# Altium PCB TeamC&K_PCB.PcbDoc (part 2 of 2)
Units mil, origin at the board's own origin, x right, y up, seen from the top; angles counter-clockwise.
Board outline 3149.61 x 2362.21 mil, 4 copper layers (Top Layer, GND, VCC, Bottom Layer), stack 30.835 mil thick; 107 components, 60 nets, 325 pads, 86 vias.
Unrouted connection lines stored in the file: 14.
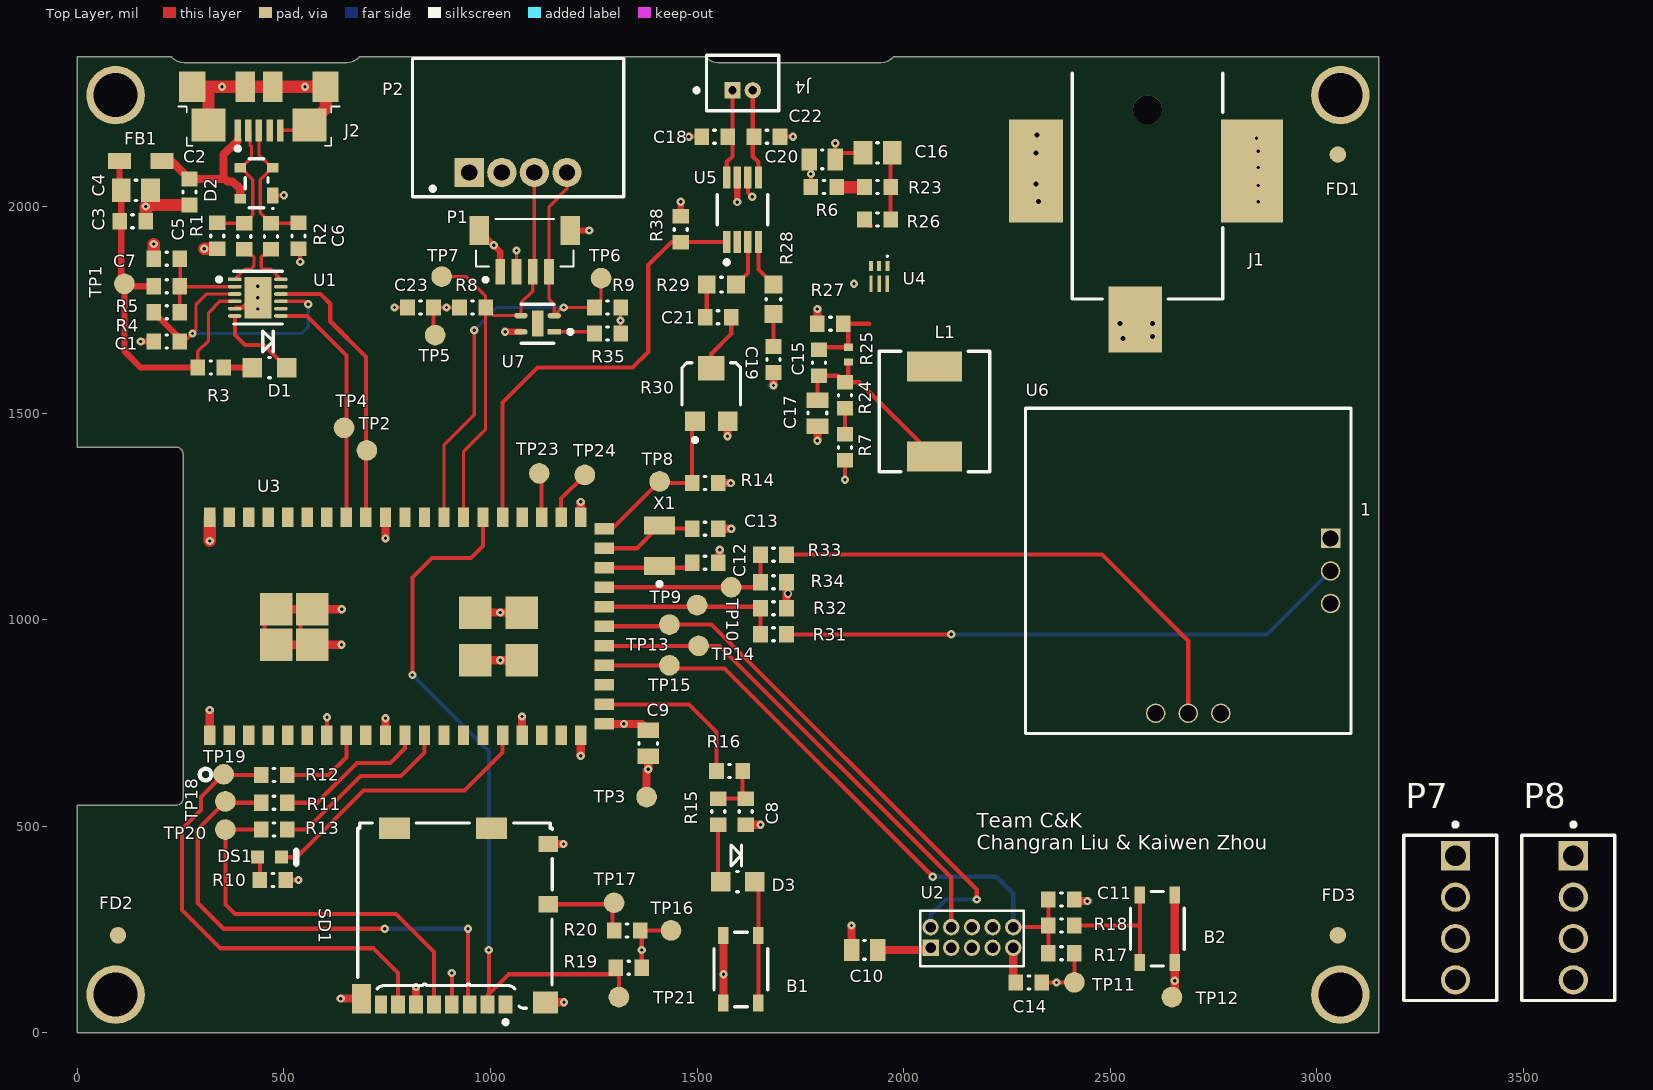
[diagram p0: Top Layer view]

## Via types
v1: diameter 20, hole 8, Top Layer to Bottom Layer, 76 vias
v2: diameter 20, hole 12, Top Layer to Bottom Layer, 9 vias
v3: diameter 20, hole 8, Top Layer to Bottom Layer, tented both sides, 1 vias

## Nets (pads, with @x,y where several pads share a name; then routed paths per layer and width w, separated by ;. In a path a pad name is that pad's centre, name@x,y a point inside that pad or via, vN(x,y) a via of type N, cw(c..) or ccw(c..) an arc to the next point about the centre after c; other vN are vias at no path point) (continued)
GND: (continued)
  Top Layer w20: U3.1 v1(320.65,781.28) ; U3.0@481.08,939.47 568.41,939.47 v1(639.27,939.47) ; U3.0@481.08,1025.38 568.41,1025.38 v1(639.98,1025.38) ; v1(637.58,82.89) SD1.12 ; U3.10 v1(745.85,761.59) ; v1(745.85,1196.85) U3.42 ; SD1.6 v1(819.86,111.2) ; U3.0@963.6,902.15 v1(1023.62,902.15) U3.0@1076,902.15 ; U3.0@963.6,1017.27 v1(1023.62,1017.27) U3.0@1076,1017.27 ; U3.17 v1(1076.56,765.96) ; SD1.11 v1(1177.93,74.04) ; SD1.10 v1(1176.95,456.91) ; v1(1218.29,671.04) U3.20 ; U3.32 v1(1218.29,1285.22) ; TP3.1 v1@1377.95,633.86 ; v1(1381.89,637.8) C9.1 ; C13.1 v1(1582.67,1220.47) ; R14.1 v1(1581.69,1330.71) ; C12.1@1555.12,1137.8 v1(1555.12,1169.29) ; B1.4 v1(1563.98,141.73) B1.3 ; v1(1573.82,1443.89) R30.3 ; C8.1 v1(1653.54,503.94) ; v1(1685.04,1566.93) C19.2 ; R32.1 R34.1 ; v1(1791.34,1433.07) C17.1 ; R27.1 v1(1791.34,1751.97) ; C10.1 v1(1874.02,259.84) ; C14.1@2265.35,128.35 U2.9 ; C11.1 2417.32,318.9 v1(2444.88,318.9) ; TP12.1@2656.5,93.5 v1(2656.5,125.98) B2.3 B2.4
  Top Layer w30: C3.1 v1(165.35,2000) 169.29,2003.94 C2.1 ; C7.1 v1(185.04,1909.45) ; J2.10 v1(350.39,2290) J2.9 J2.8 v1(551.18,2290) J2.7 601,2236.85 J2.6 ; v1(307.09,1897.64) C5.1 ; J2.11 317.54,2286.89 ; v1(320.65,1190.73) U3.51
  Bottom Layer w10: v1(539.37,1866.14) v1@539.37,1870.08
  Bottom Layer w20: v1@1681.11,1566.93 v1(1685.04,1566.93) ; v1(2444.88,318.9) v1@2448.82,318.9
  other v1: 437.01,1751.97 437.01,1779.53 437.01,1807.09 1879.92,1812.99
  other v2: 1720.47,1062.99 2531.5,1681.1 2602.36,1685.04 2523.62,1716.54 2602.36,1716.54 2326.77,2011.81 2320.47,2055.12 2320.47,2129.92 2322.83,2173.23
I2C_SCL_1: P1.4 P2.4 P7.4 P8.4 R9.1 TP6.1 U3.39 U7.2 | length 1272.1
  Top Layer w8: U3.39 887.58,1423.01 960.63,1496.06 v1(960.63,1700.79) ; v1@1174.21,1755.91 U7.2 1154.53,1762.8 1141.73,1775.59 P1.4 1141.73,2000 1185.04,2043.31 P2.4 ; v1(1177.17,1755.91) R9.1 1267.72,1771.65 TP6.1
  Bottom Layer w8: v1(960.63,1700.79) 1015.75,1755.91 v1(1177.17,1755.91)
I2C_SDA_1: P1.3 P2.3 P7.3 P8.3 R8.1 TP7.1 U3.38 U7.3 | length 1137.1
  Top Layer w8: TP7.1 940.94,1830.71 988.19,1783.46 R8.1 ; U3.38 934.82,1407.26 988.19,1460.63 R8.1 ; P2.3 1106.3,1846.46 P1.3 1102.36,1795.28 1073.82,1766.73 U7.3 1007.87,1736.22 R8.1
JOYSTICK_X_1: R31.1 R32.2 TP9.1 U3.27 | length 443.1
  Top Layer w10: U3.27 1649.76,1031.34 R32.2 R31.1
JOYSTICK_Y_1: R33.1 R34.2 TP10.1 U3.28 | length 433.8
  Top Layer w10: U3.28 TP10.1 R34.2@1641.89,1078.58 ; R34.2 R33.1
MCU_LED: DS1.2 U3.16 | length 681.3
  Top Layer w10: DS1.2 531.5,425.2 692.91,586.61 937.01,586.61 1029.31,678.92 U3.16
MCU_RESET: C11.2 R17.1 R18.2 TP15.1 U2.10 U3.24 | length 1517.1
  Top Layer w10: U3.24 TP15.1@1433.23,889.61 ; TP15.1 TP15.1@1433.23,889.61 ; v1(2070.87,377.95) 1566.93,881.89 1440.94,881.89 TP15.1@1433.23,889.61 ; U2.10 2346.46,255.91 R18.2 ; R17.1 R18.2 ; C11.2 R18.2
  Bottom Layer w10: v1(2070.87,377.95) 2224.41,377.95 2265.35,337.01 U2.10
MCU_RX_UART_CLI_1: TP4.1 U1.7 U3.44 | length 590
  Top Layer w10: U1.7 556.1,1735.24 651.36,1639.98 U3.44
MCU_TX_UART_CLI_1: TP2.1 U1.10 U3.43 | length 681.8
  Top Layer w10: U1.10 588.58,1788.39 612.2,1764.76 612.2,1722.44 698.6,1636.04 U3.43
MEM_SPI_CLK: R13.2 SD1.5 TP20.1 | length 947.1
  Top Layer w10: R13.2 TP20.1 358.27,311.02 381.89,287.4 771.65,287.4 863.17,195.89 SD1.5
MEM_SPI_MISO: R12.2 SD1.7 TP19.1 | length 1123.5
  Top Layer w10: R12.2 356.3,624.02 TP19.1 299.21,570.87 299.21,539.37 253.41,493.57 253.41,297.77 346.46,204.72 716.54,204.72 776.56,144.7 SD1.7
MEM_SPI_MOSI: R11.2 SD1.3 TP18.1 | length 1222.7
  Top Layer w10: R11.2 356.3,557.09 291.34,492.13 291.34,314.96 354.33,251.97 v1(744.09,251.97) ; v1(945.85,251.97) 945.85,73.05 SD1.3
  Bottom Layer w10: v1(744.09,251.97) v1(945.85,251.97)
NetB1_1: B1.1 B1.2 D3.2 | length 285.4
  Top Layer w10: B1.2 B1.1 D3.2@1648.62,357.28
NetB2_1: B2.1 B2.2 R18.1 | length 321.9
  Top Layer w10: R18.1 2571.85,259.84 ; B2.1 2571.85,259.84 ; B2.2 2571.85,259.84
NetC8_2: C8.2 R15.2 R16.2 | length 137.1
  Top Layer w10: R15.2 C8.2 1610.24,574.8 R16.2
NetC15_1: C15.1 R25.1 R27.2 U4.3 | length 198.3
  Top Layer w10: C15.1 1801.18,1659.45 R25.1 1866.14,1704.72 R27.2 1917.32,1716.54
NetC15_2: C15.2 C17.2 L1.2 R24.1 R25.2 | length 473.8
  Top Layer w10: C17.2 1791.34,1586.61 C15.2 1842.52,1590.55 R24.1 ; R25.2 1866.14,1582.68 R24.1 ; L1.2 2073.6,1394.69 1893.48,1574.8 R24.1
NetC16_2: C16.2 R23.2 R26.1 U4.1 U4.6 | length 168.6
  Top Layer w10: R26.1@1960.63,1960.63 R26.1 C16.2@1968.5,2125.98
NetC19_1: C19.1 R28.1 | length 84.3
  Top Layer w10: C19.1 R28.1 R28.1@1688.98,1736.22
NetC21_1: C21.1 R29.1 | length 80.4
  Top Layer w10: C21.1 1523.62,1736.22 R29.1
NetC21_2: C21.2 R30.2 | length 144
  Top Layer w10: R30.2 1534.45,1643.7 1582.68,1691.93 C21.2
NetD1_1: D1.1 R3.1 | length 69.5
  Top Layer w15: R3.1 D1.1
NetD3_1: D3.1 R15.1 | length 140.2
  Top Layer w10: R15.1 1551.18,372.05 D3.1
NetDS1_1: DS1.1 R10.2 | length 57.6
  Top Layer w10: DS1.1 441.75,419.09 R10.2
NetL1_1: L1.1 U4.5 | length 19.7
  Top Layer w10: L1.1 L1.1@2074.8,1632.87
NetR26_2: R26.2 U4.2 | length 22.3
  Top Layer w10: R26.2 R26.2@1921.26,1952.76
NetR28_2: R28.2 U5.4 | length 118.4
  Top Layer w10: U5.4 1648.62,1847.44 R28.2
NetR29_2: R29.2 U5.3 | length 115.2
  Top Layer w10: R29.2 1623.03,1839.57 U5.3
NetR31_2: R31.2 U6.2 | length 1380.5
  Top Layer w10: R31.2 v3(2115.35,964.57)
  Bottom Layer w10: v3(2115.35,964.57) 2879.92,964.57 U6.2
NetR33_2: R33.2 U6.5 | length 1234.1
  Top Layer w10: R33.2 2480.32,1157.48 2688.98,948.82 U6.5
NetR35_2: R35.2 U7.1 | length 93.5
  Top Layer w8: U7.1 R35.2@1248.03,1696.85
RS_4: C7.2 R4.2 R5.2 U1.2 | length 263.6
  Top Layer w8: R4.2 R5.2 ; C7.2 249.02,1873.03 249.02,1806.1 U1.2
SD_CARD_DETECT: R20.1 SD1.9 TP17.1 | length 220.1
  Top Layer w10: SD1.9 1295.49,311.24 1295.49,251.75 R20.1
SERCOM1_PAD2_SPI_MISO: R12.1 U3.8 | length 214.7
  Top Layer w10: R12.1 608.27,624.02 651.36,667.11 U3.8
SERCOM1_PAD2_SPI_MOSI: R11.1 U3.11 | length 371.3
  Top Layer w10: R11.1 580.71,557.09 677.17,653.54 757.66,653.54 793.09,688.98 U3.11
SERCOM1_PAD3_SPI_SCK: R13.1 U3.12 | length 451.4
  Top Layer w10: R13.1 555.12,492.13 685.04,622.05 783.46,622.05 840.33,678.92 U3.12
SPEAKER_OUT_1: R14.2 R30.1 TP8.1 U3.31 | length 411.4
  Top Layer w10: U3.31 1295.12,1220.31 1405.51,1330.71 R14.2 1488.19,1473.43 R30.1
SWCLK: TP14.1 U2.4 U3.25 | length 1192.6
  Top Layer w10: U3.25 TP14.1 1554.29,936.85 2115.35,375.79 U2.4
SWDIO: TP13.1 U2.2 U3.26 | length 1348.6
  Top Layer w10: U3.26 TP13.1@1433.07,984.09 ; TP13.1 1535.43,988.19 2177.17,346.46 v1(2177.17,322.83)
  Bottom Layer w10: U2.2 2065.35,285.83 2102.36,322.83 v1(2177.17,322.83)
USB_DATA_N: C5.2 D2.3 J2.2 R1.1 | length 327.1
  Top Layer w8: C5.2 339.72,1959.5 R1.1 424.88,1980.37 424.88,2065.53 D2.3@396.48,2093.93 ; D2.3 D2.3@396.48,2093.93 ; J2.2 417.87,2180.81 417.87,2148.84 421.71,2145 421.71,2119.16 D2.3@396.48,2093.93
USB_DATA_P: C6.2 D2.2 J2.3 R2.1 | length 322.3
  Top Layer w8: J2.3@442.88,2176 439.71,2172.83 439.71,2125.5 D2.2@471.28,2093.93 ; D2.2 D2.2@471.28,2093.93 ; C6.2 534.3,1959.5 R2.1 442.88,1985.62 442.88,2065.53 D2.2@471.28,2093.93
USB_FTDI_DATA_4_N: R1.2 U1.1 | length 113.2
  Top Layer w8: U1.1 406.38,1848.92 421.16,1848.92 427.5,1855.26 427.5,1878.1 422.81,1882.79 417.72,1882.79 R1.2
USB_FTDI_DATA_4_P: R2.2 U1.12 | length 115.2
  Top Layer w8: R2.2 455.28,1882.79 450.19,1882.79 445.5,1878.1 445.5,1853.61 450.19,1848.92 467.63,1848.92 U1.12
VBUS: C2.2 D2.4 FB1.1 J2.1 | length 375.4
  Top Layer w8: J2.1@388.4,2160.28 J2.1
  Top Layer w20: FB1.1 227.99,2110.59 C2.2 350.93,2066.93 354,2070 ; J2.1@388.4,2160.28 354,2125.88 354,2070 ; D2.4@392.03,2018.62 394,2018.62 D2.4 394.51,2042.28 375.79,2061 363,2061 354,2070
VCCIO_4: C1.2 R4.1 U1.3 U1.9 | length 725.4
  Top Layer w8: C1.2 259.23,1673.23 v1(278.92,1692.91) 287.4,1701.4 287.4,1763.78 312.01,1788.39 U1.3 ; U1.9 552.16,1770.67 v1(559.05,1763.78)
  Top Layer w15: R4.1 248.03,1681.1 C1.2
  Bottom Layer w8: v1(278.92,1692.91) 543.31,1692.91 559.05,1708.66 v1(559.05,1763.78)
VIN: R6.2 R23.1 | length 66.9
  Top Layer w30: R6.2 R23.1
VOUT: R7.1 R24.2 | length 63
  Top Layer w10: R7.1 R24.2
VUSB: C3.2 C4.2 FB1.2 R3.2 R5.1 TP1.1 U1.4 | length 954.2
  Top Layer w8: R3.2 291.34,1649.61 317.54,1675.8 317.54,1743.5 344.7,1770.67 U1.4
  Top Layer w15: C4.2@102.36,2039.37 FB1.2 ; C4.2 106.3,1830.71 TP1.1@129.92,1807.09 ; R5.1 114.17,1807.09 114.17,1649.61 153.54,1610.24 R3.2
XIN_32_3: C12.2 U3.29 X1.1 | length 222.1
  Top Layer w10: U3.29 1480.16,1125.83 C12.2@1492.13,1137.8
XOUT_32_3: C13.2 U3.30 X1.2 | length 232.8
  Top Layer w10: U3.30 1354.39,1173.07 1401.79,1220.47 C13.2
pads on no net: FD1. FD2. FD3. J1. J2.4 SD1.1 SD1.8 SD1.13 SD1.14 U1.8 U1.11 U2.6 U2.7 U2.8 U3.2 U3.3 U3.4 U3.5 U3.6 U3.9 U3.13 U3.14 U3.15 U3.18 U3.19 U3.23 U3.35 U3.40 U3.41 U3.45 U3.46 U3.47 U3.48 U3.49 U3.50 U5.2 U7.5

## Polygon pours and split planes (outlines as drawn)
GND on GND (split plane): 203 vertices, not listed, extent 20.1,20.1 3129.51,2342.11
3V3 on VCC (split plane): 163 vertices, not listed, extent 20.1,20.1 3129.51,2342.11
5V on VCC (split plane): 3129.51,1776.88 1526.88,1776.88 1526.88,2333.47 1527.88,2333.02 1528.03,2332.98 1528.18,2332.91 1536.36,2330.23 1536.51,2330.2 1536.66,2330.13 1538.43,2329.77 1540.2,2329.38 1540.36,2329.37 1540.52,2329.34 1549.08,2328.44 1550.13,2328.43 1551.18,2328.33 1944.88,2328.33 1945.93,2328.43 1946.98,2328.44 1955.55,2329.34 1955.71,2329.37 1955.88,2329.37 1957.64,2329.77 1959.4,2330.13 1959.56,2330.2 1959.72,2330.23 1967.9,2332.92 1968.06,2332.99 1968.22,2333.03 1969.86,2333.78 1971.51,2334.51 1971.65,2334.61 1971.8,2334.68 1979.23,2339.04 1979.37,2339.14 1979.52,2339.21 1980.96,2340.3 1982.41,2341.36 1982.53,2341.48 1982.66,2341.58 1983.23,2342.11 3129.51,2342.11

## Other copper
GND (plane layer: these items are gaps in the copper):
  lines w30: 0,1417.32 0,2362.2 ; 0,2362.2 0,0 7.87,-7.87 3141.73,-7.87 3149.61,0 3149.61,2354.33 3141.73,2362.21 0,2362.21 ; 0,2362.2 0,2362.21
VCC (plane layer: these items are gaps in the copper):
  lines w30: 255.71,1407.05 255.71,565.18 242.11,551.57 0.39,551.57 0,551.18 0,0 ; 1511.81,2366.14 1511.81,1761.81 3149.61,1761.81 3149.61,2354.33 3145.67,2358.27 1524.57,2358.27 ; 3149.15,602.82 3149.61,602.36 3149.61,0 ; 0,0 0,0 ; 0,0 3149.61,0 ; 3149.61,0 3149.61,0

## Silkscreen, mask and mechanical layers (free items; w line width, h text height)
Top Overlay:
  text "Team C&K / Changran Liu & Kaiwen Zhou" at 2177.17,442.91 h35.43
Mechanical 4:
  lines w20: 661.15,0 672.23,10.19 680.41,12.88 688.98,13.78 1082.68,13.78 1091.24,12.88 1099.41,10.2 1106.84,5.85 1113.19,0.04 ; 661.42,0 0,0 0,551.18 240.16,551.18 243.66,551.57 246.99,552.73 249.98,554.61 252.48,557.1 254.35,560.09 255.51,563.42 255.91,566.93 255.91,1401.57 255.51,1405.08 254.35,1408.41 252.48,1411.4 249.98,1413.89 246.99,1415.77 243.66,1416.93 240.16,1417.32 0,1417.32 0,2362.2 227.99,2362.16 234.34,2356.35 241.77,2352.01 249.95,2349.33 258.5,2348.42 652.2,2348.42 660.77,2349.32 668.95,2352.01 676.38,2356.37 682.72,2362.2 1975.39,2362.14 ; 1114.17,0 3149.61,0 3149.61,2362.21 1972.7,2362.2

## Text inside footprints (layer, text, board x,y; h text height)
J2: Mechanical 1 "Board edge" at 219.58,2342.34 h30 r180
U6: Top Overlay "1" at 3105.47,1252.13 h30